# EAGLE board rotary_encoder_2 (EAGLE 7.7.0)

Size 16 x 10 mm. Coordinates in mm from the lower left corner, seen from the top.
Outline: 2,3 arc-180 2,7 2,10 14,10 14,7 arc-180 14,3 14,0 2,0 2,3
Copper layers (1*16): Top 0.035mm / dielectric 1.5mm / Bottom 0.035mm
Design rules "SeeedStudio_2layer_DRU_no_angle_20140221": minimum track width 6mil, minimum drill 12mil, track to track 6mil, track to pad 6mil, pad to pad 6mil, via to via 6mil, smd to smd 0mil, copper to edge 10mil, drill to drill 10mil, minimum pad ring 10mil, minimum via ring 6mil, stop-mask expansion 2mil, vias tented up to drill 100mil, thermal gap 10mil
Holes 2.2 mm at 2,5 14,5

## Footprints (pad centres in the part's own frame; a part is rotated, then mirrored left to right if it is on the bottom)
1,6/0,8 = drill 0.813 pad 1.6 octagon: 1 0,0
CAP_0805_100NF = smd 0.914 x 1.448: 1 -0.813,0; 2 0.813,0
AS5045_ROTARY_ENCODER = smd 1.43 x 0.46: CLK 3.78,-1.59; CSN 3.78,-0.94; DO 3.78,-2.24; MAG_DEC_N -3.81,1.66; MAG_INC_N -3.81,2.31; MODE -3.81,-0.94; NC0 -3.81,1.01; NC1 -3.81,0.36; NC2 -3.81,-0.29; NC3 3.78,1.01; NC4 3.78,0.36; PROG_DI -3.81,-2.24; PWM 3.78,-0.29; VDD3V3 3.78,1.66; VDD5V 3.78,2.31; VSS -3.81,-1.59

## Placement (x,y rotation side)
5V  [1,6/0,8]  -19.05,22.86 0 top  (outside the outline)
C1  10uF  [CAP_0805_100NF]  3.23,8.29 90 top
C2  100nF  [CAP_0805_100NF]  3.22,1.65 90 top
CLK  [1,6/0,8]  -26.67,19.05 0 top  (outside the outline)
CSN  [1,6/0,8]  -21.59,19.05 0 top  (outside the outline)
DO  [1,6/0,8]  -15.24,22.86 0 top  (outside the outline)
GND  [1,6/0,8]  -16.51,19.05 0 top  (outside the outline)
U$1  AS5045_ROTARY_ENCODER  [AS5045_ROTARY_ENCODER]  7.74,5.19 90 top

## Library data of the parts
5V CLK CSN DO GND = wirepad
C1 = cap_0805; MPN: 0805F106Z100CT; OC_FARNELL: 1759421; SUPPLIER: Multicomp; TOLERANCE: -20/+80%; VOLTAGERATING: 10V
C2 = cap_0805; MPN: U0805F104ZCT; OC_FARNELL: 9406409; OC_NEWARK: 38K9281; SUPPLIER: Multicomp; TOLERANCE: -20/+80%; VOLTAGERATING: 50V
U$1 = DCG_encoders

## Nets
5V: 5V.1 C2.1 U$1.VDD5V
CLK: CLK.1 U$1.CLK
CSN: CSN.1 U$1.CSN
DO: DO.1 U$1.DO
GND: C1.2 C2.2 GND.1 U$1.VSS
N$2: C1.1 U$1.VDD3V3
N$3: U$1.NC3
N$4: U$1.NC4
N$5: U$1.PWM
N$9: U$1.MAG_INC_N
N$10: U$1.MAG_DEC_N
N$11: U$1.NC0
N$12: U$1.NC1
N$13: U$1.NC2
N$14: U$1.MODE
N$16: U$1.PROG_DI

## Tracks (layer width: path | path; a pad name or v marks a point on that pad's centre or on a via)
5V  (2 unrouted)
CLK  (1 unrouted)
CSN  (1 unrouted)
DO  (1 unrouted)
GND  (3 unrouted)
N$2  (1 unrouted)